# Altium PCB Grabber_DIOT.PCBDOC (part 7 of 7)
Units mm, origin at the board's own origin, x right, y up, seen from the top; angles counter-clockwise.
Board outline 222.9 x 100 mm, 4 copper layers (L1, P2, P3, L4), stack 1.6 mm thick; 235 components, 180 nets, 1032 pads, 664 vias.
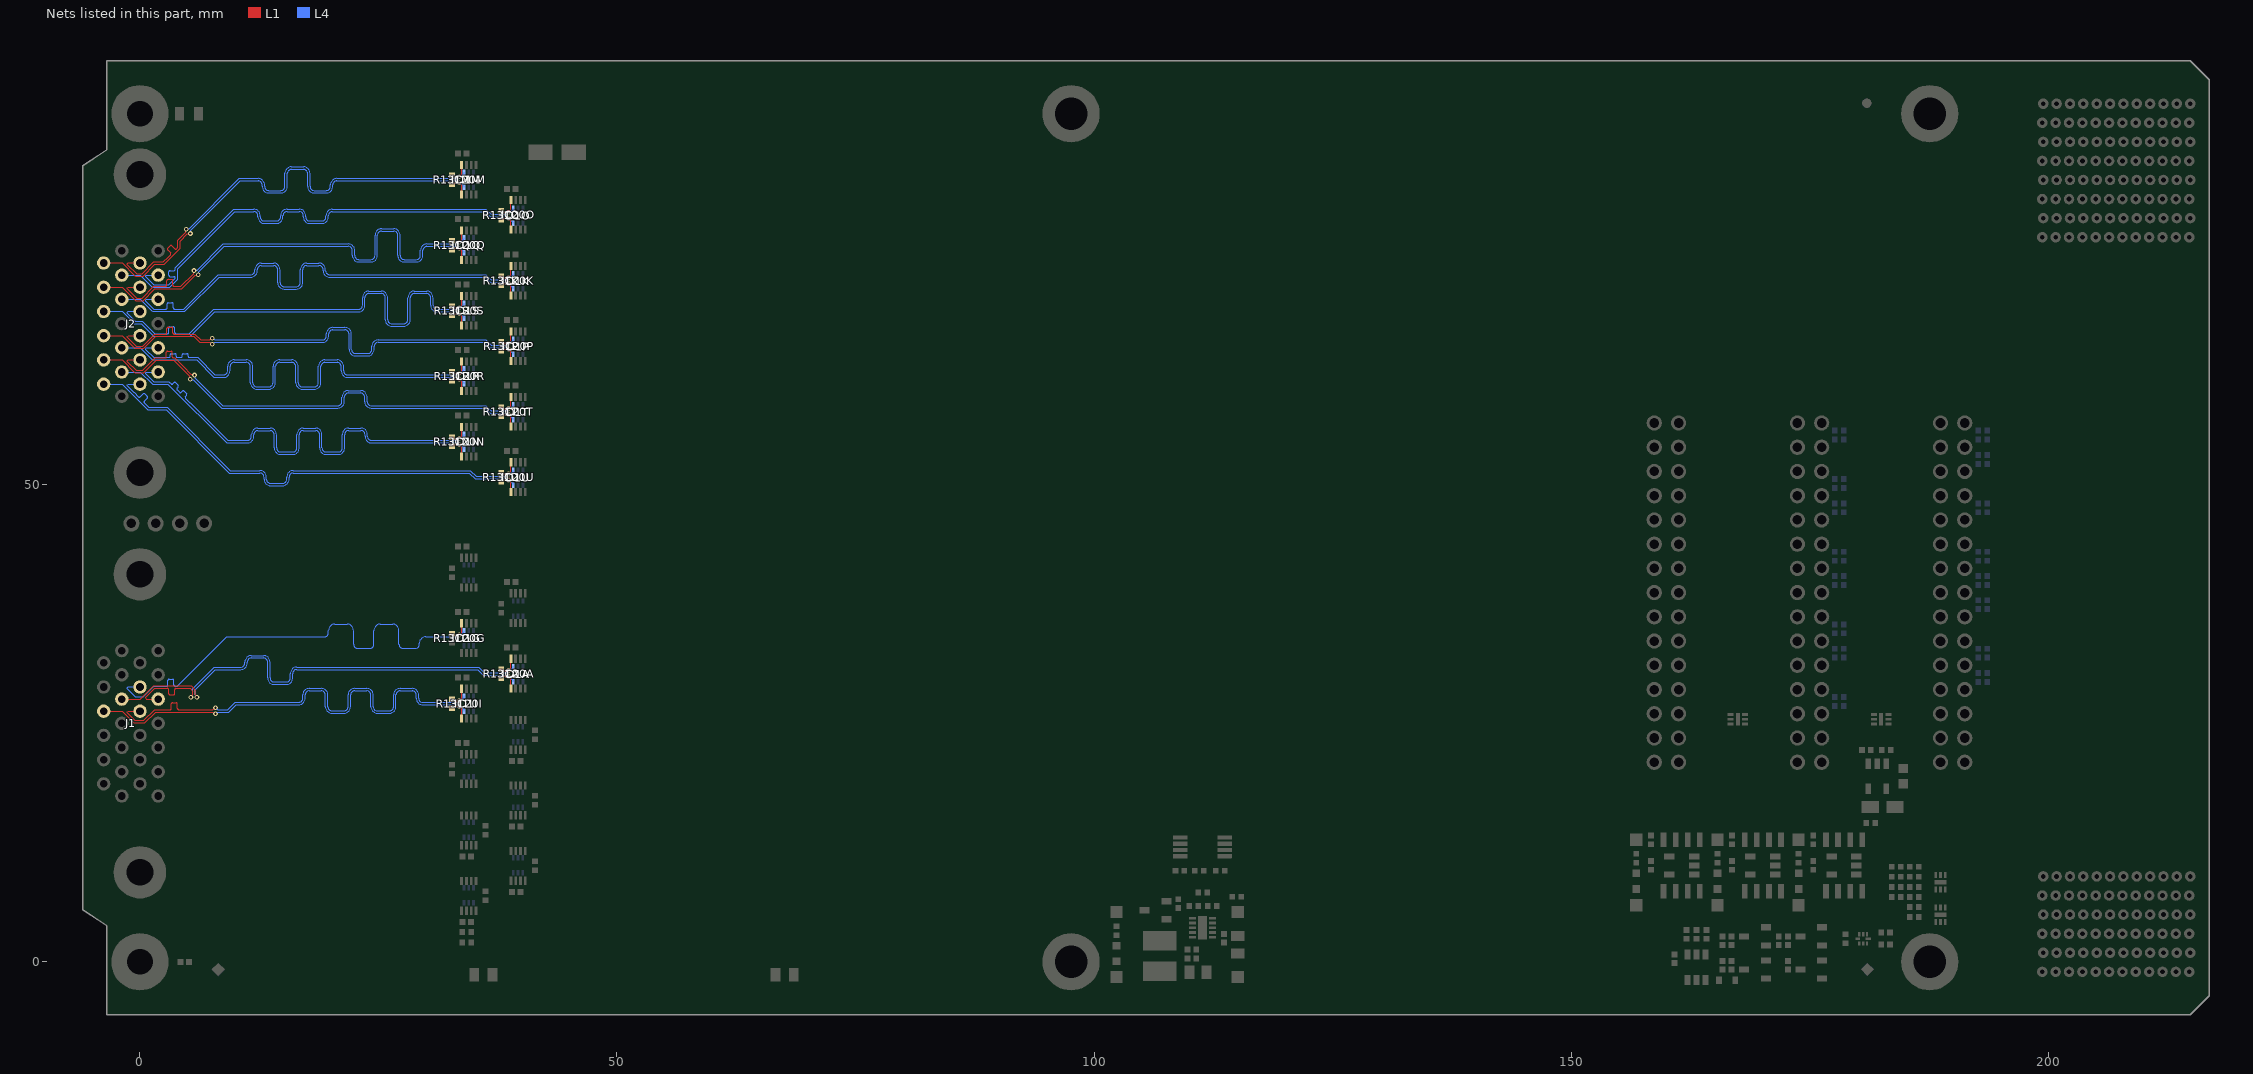
[diagram p8: the nets of this part, all layers, seen from the top]

## Via types
v1: diameter 0.5, hole 0.25, L1 to L4, tented both sides, 661 vias
v2: diameter 0.5, hole 0.25, L1 to L4, 3 vias

## Nets (pads, with @x,y where several pads share a name; then routed paths per layer and width w, separated by ;. In a path a pad name is that pad's centre, name@x,y a point inside that pad or via, vN(x,y) a via of type N, cw(c..) or ccw(c..) an arc to the next point about the centre after c; other vN are vias at no path point) (continued)
X2_P: D1G.4 IC20G.8 J1.10 R131G.2 | length 51.2
  L1 w0.127: R131G.2@32.709,34.403 32.872,34.241 v1@33.465,34.241 ; v1@33.468,34.241 33.718,34.491 IC20G.8@33.718,35.487
  L4 w0.127: J1.10@0,28.81 -1.243,28.81 -1.318,28.736 -1.318,28.63 -0.481,27.794 0.317,27.794 0.954,28.431 1.427,28.904 2.248,28.904 2.803,28.904 ccw(c2.803,29.031) 2.93,29.031 2.93,29.499 cw(c3.056,29.499) 3.056,29.625 3.432,29.625 cw(c3.432,29.499) 3.557,29.499 3.557,29.031 ccw(c3.684,29.031) 3.684,28.904 3.923,28.904 4.311,29.291 9.083,34.064 18.221,34.064 19.327,34.064 ccw(c19.327,34.489) 19.753,34.489 19.753,34.717 cw(c20.432,34.717) 20.432,35.397 21.708,35.397 cw(c21.708,34.717) 22.388,34.717 22.388,33.277 ccw(c22.813,33.277) 22.813,32.852 24.089,32.852 ccw(c24.089,33.277) 24.515,33.277 24.515,34.717 cw(c25.194,34.717) 25.194,35.397 26.47,35.397 cw(c26.47,34.717) 27.15,34.717 27.15,33.277 ccw(c27.575,33.277) 27.575,32.852 28.851,32.852 ccw(c28.851,33.277) 29.277,33.277 29.277,33.384 cw(c29.956,33.384) 29.956,34.064 30.147,34.064 33.204,34.064 33.39,34.25 v1(33.465,34.25) 33.566,34.25 33.822,34.506 33.881,34.506 33.968,34.592 D1G.4@33.968,34.727
X3_N: D1I.3 IC20I.1 J1.21 R131I.1 | length 51.2
  L1 w0.127: J1.21@-3.81,26.27 -1.857,26.27 -0.703,25.117 -0.629,25.042 0.493,25.042 1.634,26.183 7.652,26.183 7.837,25.997 v1(7.913,25.997) ; R131I.1@32.709,26.6 32.88,26.77 33.465,26.77 v1(33.465,26.76) ; v1(33.465,26.76) 33.718,26.507 IC20I.1@33.718,25.524
  L4 w0.127: v1(7.913,25.997) 7.988,25.997 8.174,26.183 9.308,26.183 10.071,26.946 16.44,26.946 16.631,26.946 ccw(c16.631,27.625) 17.31,27.625 17.31,27.976 cw(c17.735,27.976) 17.735,28.401 19.012,28.401 cw(c19.012,27.976) 19.437,27.976 19.437,26.739 ccw(c20.116,26.739) 20.116,26.059 21.393,26.059 ccw(c21.393,26.739) 22.072,26.739 22.072,27.976 cw(c22.497,27.976) 22.497,28.401 23.774,28.401 cw(c23.774,27.976) 24.199,27.976 24.199,26.739 ccw(c24.878,26.739) 24.878,26.059 26.155,26.059 ccw(c26.155,26.739) 26.834,26.739 26.834,27.976 cw(c27.259,27.976) 27.259,28.401 28.536,28.401 cw(c28.536,27.976) 28.961,27.976 28.961,27.625 ccw(c29.64,27.625) 29.64,26.946 30.38,26.946 30.518,26.946 33.204,26.946 33.39,26.76 v1(33.465,26.76) 33.566,26.76 33.821,26.505 33.881,26.505 33.968,26.419 D1I.3@33.968,26.284
X3_P: D1I.4 IC20I.8 J1.8 R131I.2 | length 51.2
  L1 w0.127: J1.8@0,26.27 -1.243,26.27 -1.318,26.196 -1.318,26.09 -0.524,25.296 0.388,25.296 1.528,26.437 2.832,26.437 3.175,26.437 ccw(c3.175,26.564) 3.302,26.564 3.302,27.038 cw(c3.427,27.038) 3.427,27.164 3.803,27.164 cw(c3.803,27.038) 3.929,27.038 3.929,26.564 ccw(c4.056,26.564) 4.056,26.437 4.746,26.437 7.652,26.437 7.837,26.622 v1(7.913,26.622) ; R131I.2@32.709,27.54 32.872,27.377 v1@33.465,27.377 ; v1@33.468,27.377 33.718,27.627 IC20I.8@33.718,28.624
  L4 w0.127: v1(7.913,26.622) 7.988,26.622 8.174,26.437 9.203,26.437 9.966,27.2 14.287,27.2 16.44,27.2 16.631,27.2 ccw(c16.631,27.625) 17.056,27.625 17.056,27.976 cw(c17.735,27.976) 17.735,28.655 19.012,28.655 cw(c19.012,27.976) 19.691,27.976 19.691,26.739 ccw(c20.116,26.739) 20.116,26.313 21.393,26.313 ccw(c21.393,26.739) 21.818,26.739 21.818,27.976 cw(c22.497,27.976) 22.497,28.655 23.774,28.655 cw(c23.774,27.976) 24.453,27.976 24.453,26.739 ccw(c24.878,26.739) 24.878,26.313 26.155,26.313 ccw(c26.155,26.739) 26.58,26.739 26.58,27.976 cw(c27.259,27.976) 27.259,28.655 28.536,28.655 cw(c28.536,27.976) 29.215,27.976 29.215,27.625 ccw(c29.64,27.625) 29.64,27.2 30.38,27.2 30.413,27.2 30.518,27.2 33.204,27.2 33.39,27.386 v1(33.465,27.386) 33.566,27.386 33.822,27.642 33.881,27.642 33.968,27.729 D1I.4@33.968,27.864
XCLK_N: D1A.3 IC20A.1 J1.22 R131A.1 | length 51.3
  L1 w0.127: J1.22@-1.905,27.54 0.048,27.54 1.348,28.84 1.423,28.914 5.352,28.914 5.778,28.488 5.778,27.985 5.964,27.8 v1(5.964,27.725) ; R131A.1@37.872,29.743 38.042,29.914 38.628,29.914 v1(38.628,29.904) 38.88,29.651 IC20A.1@38.88,28.667
  L4 w0.127: v1(5.964,27.725) 5.964,27.8 5.778,27.985 5.778,28.532 7.885,30.639 10.38,30.639 10.57,30.639 ccw(c10.57,31.318) 11.25,31.318 11.25,31.425 cw(c11.675,31.425) 11.675,31.851 12.951,31.851 cw(c12.951,31.425) 13.377,31.425 13.377,29.757 ccw(c14.056,29.757) 14.056,29.077 15.332,29.077 ccw(c15.332,29.757) 16.012,29.757 16.012,30.213 cw(c16.437,30.213) 16.437,30.639 17.586,30.639 35.4,30.639 36,30.04 38.367,30.04 38.553,29.854 38.729,29.854 38.984,29.599 39.044,29.599 39.13,29.512 D1A.3@39.13,29.377
XCLK_P: D1A.4 IC20A.8 J1.9 R131A.2 | length 51.2
  L1 w0.127: J1.9@1.905,27.54 0.662,27.54 0.587,27.614 0.587,27.72 1.002,28.135 1.528,28.66 2.883,28.66 cw(c2.883,28.533) 3.01,28.533 3.01,28.121 ccw(c3.135,28.121) 3.135,27.995 3.511,27.995 ccw(c3.511,28.121) 3.637,28.121 3.637,28.533 cw(c3.764,28.533) 3.764,28.66 4.567,28.66 5.247,28.66 5.524,28.383 5.524,27.985 5.339,27.8 v1(5.339,27.725) ; R131A.2@37.872,30.683 38.034,30.521 v1@38.628,30.521 ; v1@38.63,30.521 38.88,30.771 IC20A.8@38.88,31.767
  L4 w0.127: v1(5.339,27.725) 5.339,27.8 5.524,27.985 5.524,28.638 7.78,30.893 10.38,30.893 10.57,30.893 ccw(c10.57,31.318) 10.996,31.318 10.996,31.425 cw(c11.675,31.425) 11.675,32.105 12.951,32.105 cw(c12.951,31.425) 13.631,31.425 13.631,29.757 ccw(c14.056,29.757) 14.056,29.331 15.332,29.331 ccw(c15.332,29.757) 15.758,29.757 15.758,30.213 cw(c16.437,30.213) 16.437,30.893 17.586,30.893 35.506,30.893 35.58,30.818 36.105,30.294 38.367,30.294 38.553,30.48 38.729,30.48 38.985,30.736 39.044,30.736 39.13,30.822 D1A.4@39.13,30.957
  other v1: 38.628,30.53
Y0_N: D1M.3 IC20M.1 J2.25 R131M.1 | length 51.2
  L1 w0.127: J2.25@-3.81,73.25 -1.857,73.25 -0.536,71.93 -0.462,71.856 0.326,71.856 1.573,73.102 2.556,73.102 4.23,74.776 4.23,75.551 4.97,76.291 5.232,76.291 v1(5.285,76.345) ; R131M.1@32.709,81.51 32.88,81.681 33.465,81.681 v1(33.465,81.671) 33.718,81.418 IC20M.1@33.718,80.434
  L4 w0.127: v1(5.285,76.345) 5.339,76.398 5.339,76.66 10.535,81.856 10.818,81.856 12.385,81.856 cw(c12.385,81.431) 12.81,81.431 12.81,81.273 ccw(c13.489,81.273) 13.489,80.594 14.766,80.594 ccw(c14.766,81.273) 15.445,81.273 15.445,82.643 cw(c15.87,82.643) 15.87,83.068 17.147,83.068 cw(c17.147,82.643) 17.572,82.643 17.572,81.273 ccw(c18.251,81.273) 18.251,80.594 19.528,80.594 ccw(c19.528,81.273) 20.207,81.273 20.207,81.431 cw(c20.632,81.431) 20.632,81.856 20.823,81.856 33.204,81.856 33.39,81.671 v1(33.465,81.671) 33.566,81.671 33.821,81.415 33.881,81.415 33.968,81.329 D1M.3@33.968,81.194
Y0_P: D1M.4 IC20M.8 J2.12 R131M.2 | length 51.2
  L1 w0.127: J2.12@0,73.25 -1.243,73.25 -1.318,73.176 -1.318,73.071 -0.357,72.11 0.221,72.11 1.467,73.356 2.451,73.356 2.96,73.866 3.214,74.119 ccw(c3.124,74.209) 3.214,74.299 2.9,74.613 cw(c2.989,74.701) 2.9,74.79 3.166,75.056 cw(c3.255,74.967) 3.344,75.056 3.657,74.742 ccw(c3.747,74.832) 3.837,74.742 3.976,74.881 3.976,75.489 3.976,75.656 4.79,76.471 4.79,76.733 v1(4.843,76.787) ; R131M.2@32.709,82.45 32.872,82.287 v1@33.465,82.287 ; v1@33.468,82.287 33.718,82.537 IC20M.8@33.718,83.534
  L4 w0.127: v1(4.843,76.787) 4.897,76.84 5.159,76.84 10.43,82.11 10.818,82.11 12.385,82.11 cw(c12.385,81.431) 13.064,81.431 13.064,81.273 ccw(c13.489,81.273) 13.489,80.848 14.766,80.848 ccw(c14.766,81.273) 15.191,81.273 15.191,82.643 cw(c15.87,82.643) 15.87,83.322 17.147,83.322 cw(c17.147,82.643) 17.826,82.643 17.826,81.273 ccw(c18.251,81.273) 18.251,80.848 19.528,80.848 ccw(c19.528,81.273) 19.953,81.273 19.953,81.431 cw(c20.632,81.431) 20.632,82.11 20.823,82.11 33.204,82.11 33.39,82.296 v1(33.465,82.296) 33.566,82.296 33.822,82.552 33.881,82.552 33.968,82.639 D1M.4@33.968,82.774
Y1_N: D1O.3 IC20O.1 J2.24 R131O.1 | length 51.3
  L1 w0.127: R131O.1@37.872,77.79 38.042,77.961 38.628,77.961 v1(38.628,77.951) 38.88,77.697 IC20O.1@38.88,76.714
  L4 w0.127: J2.24@-1.905,71.98 0.048,71.98 1.244,70.785 1.318,70.71 3.128,70.71 3.938,71.521 3.938,72.663 9.91,78.635 10.484,78.635 11.929,78.635 cw(c11.929,78.209) 12.355,78.209 12.355,78.084 ccw(c13.034,78.084) 13.034,77.404 14.31,77.404 ccw(c14.31,78.084) 14.99,78.084 14.99,78.211 cw(c15.415,78.211) 15.415,78.636 16.691,78.636 cw(c16.691,78.211) 17.117,78.211 17.117,78.084 ccw(c17.796,78.084) 17.796,77.404 19.072,77.404 ccw(c19.072,78.084) 19.752,78.084 19.752,78.209 cw(c20.177,78.209) 20.177,78.635 20.368,78.635 36.143,78.635 36.691,78.086 38.367,78.086 38.553,77.901 38.729,77.901 38.984,77.645 39.044,77.645 39.13,77.559 D1O.3@39.13,77.424
Y1_P: D1O.4 IC20O.8 J2.11 R131O.2 | length 51.2
  L1 w0.127: R131O.2@37.872,78.73 38.034,78.567 v1@38.628,78.567 ; v1@38.63,78.567 38.88,78.817 IC20O.8@38.88,79.814
  L4 w0.127: J2.11@1.905,71.98 0.662,71.98 0.587,71.906 0.587,71.801 1.424,70.964 3.023,70.964 3.162,71.104 3.684,71.626 3.684,71.693 ccw(c3.557,71.693) 3.557,71.82 3.157,71.82 cw(c3.157,71.945) 3.032,71.945 3.032,72.321 cw(c3.157,72.321) 3.157,72.447 3.557,72.447 ccw(c3.557,72.574) 3.684,72.574 3.684,72.768 4.307,73.391 9.805,78.889 10.484,78.889 11.929,78.889 cw(c11.929,78.209) 12.609,78.209 12.609,78.084 ccw(c13.034,78.084) 13.034,77.658 14.31,77.658 ccw(c14.31,78.084) 14.736,78.084 14.736,78.211 cw(c15.415,78.211) 15.415,78.89 16.691,78.89 cw(c16.691,78.211) 17.371,78.211 17.371,78.084 ccw(c17.796,78.084) 17.796,77.658 19.072,77.658 ccw(c19.072,78.084) 19.498,78.084 19.498,78.209 cw(c20.177,78.209) 20.177,78.889 20.368,78.889 36.248,78.889 36.796,78.34 38.367,78.34 38.553,78.526 38.729,78.526 38.985,78.782 39.044,78.782 39.13,78.869 D1O.4@39.13,79.004
  other v1: 38.628,78.576
Y2_N: D1Q.3 IC20Q.1 J2.23 R131Q.1 | length 51.2
  L1 w0.127: J2.23@-3.81,70.71 -1.857,70.71 -0.536,69.39 -0.462,69.316 0.326,69.316 1.573,70.562 4.399,70.562 5.794,71.957 6.056,71.957 v1(6.11,72.01) ; R131Q.1@32.709,74.646 32.88,74.817 33.465,74.817 v1(33.465,74.807) ; v1(33.465,74.807) 33.718,74.554 IC20Q.1@33.718,73.57
  L4 w0.127: v1(6.11,72.01) 6.163,72.063 6.163,72.326 8.83,74.993 20.71,74.993 21.83,74.993 cw(c21.83,74.567) 22.256,74.567 22.256,74.037 ccw(c22.935,74.037) 22.935,73.358 24.211,73.358 ccw(c24.211,74.037) 24.891,74.037 24.891,76.167 cw(c25.316,76.167) 25.316,76.592 26.592,76.592 cw(c26.592,76.167) 27.018,76.167 27.018,74.037 ccw(c27.697,74.037) 27.697,73.358 28.973,73.358 ccw(c28.973,74.037) 29.653,74.037 29.653,74.567 cw(c30.078,74.567) 30.078,74.993 30.268,74.993 33.204,74.993 33.39,74.807 v1(33.465,74.807) 33.566,74.807 33.821,74.552 33.881,74.552 33.968,74.465 D1Q.3@33.968,74.33
Y2_P: D1Q.4 IC20Q.8 J2.10 R131Q.2 | length 51.2
  L1 w0.127: J2.10@0,70.71 -1.243,70.71 -1.318,70.636 -1.318,70.531 -0.357,69.57 0.221,69.57 1.467,70.816 2.193,70.816 2.685,70.816 ccw(c2.685,70.943) 2.812,70.943 2.812,71.395 cw(c2.938,71.395) 2.938,71.52 3.314,71.52 cw(c3.314,71.395) 3.439,71.395 3.439,70.943 ccw(c3.566,70.943) 3.566,70.816 4.257,70.816 4.294,70.816 5.614,72.136 5.614,72.399 v1(5.668,72.452) ; R131Q.2@32.709,75.586 32.872,75.424 v1@33.465,75.424 ; v1@33.468,75.424 33.718,75.674 IC20Q.8@33.718,76.67
  L4 w0.127: v1(5.668,72.452) 5.721,72.505 5.983,72.505 8.725,75.247 20.71,75.247 21.83,75.247 cw(c21.83,74.567) 22.51,74.567 22.51,74.037 ccw(c22.935,74.037) 22.935,73.612 24.211,73.612 ccw(c24.211,74.037) 24.637,74.037 24.637,76.167 cw(c25.316,76.167) 25.316,76.846 26.592,76.846 cw(c26.592,76.167) 27.272,76.167 27.272,74.037 ccw(c27.697,74.037) 27.697,73.612 28.973,73.612 ccw(c28.973,74.037) 29.399,74.037 29.399,74.567 cw(c30.078,74.567) 30.078,75.247 30.268,75.247 33.204,75.247 33.39,75.433 v1(33.465,75.433) 33.566,75.433 33.822,75.689 33.881,75.689 33.968,75.775 D1Q.4@33.968,75.91
Y3_N: D1S.3 IC20S.1 J2.21 R131S.1 | length 51.2
  L1 w0.127: R131S.1@32.709,67.782 32.88,67.953 33.465,67.953 v1(33.465,67.943) 33.718,67.69 IC20S.1@33.718,66.706
  L4 w0.127: J2.21@-3.81,68.17 -1.857,68.17 -0.661,66.975 -0.587,66.9 0.129,66.9 1.442,65.587 5.288,65.587 7.83,68.129 22.708,68.129 22.899,68.129 ccw(c22.899,68.808) 23.578,68.808 23.578,69.631 cw(c24.003,69.631) 24.003,70.057 25.28,70.057 cw(c25.28,69.631) 25.705,69.631 25.705,67.314 ccw(c26.384,67.314) 26.384,66.634 27.661,66.634 ccw(c27.661,67.314) 28.34,67.314 28.34,69.631 cw(c28.765,69.631) 28.765,70.057 30.042,70.057 cw(c30.042,69.631) 30.467,69.631 30.467,68.808 ccw(c31.146,68.808) 31.146,68.129 32.165,68.129 33.204,68.129 33.39,67.943 v1(33.465,67.943) 33.566,67.943 33.821,67.688 33.881,67.688 33.968,67.601 D1S.3@33.968,67.466
Y3_P: D1S.4 IC20S.8 J2.8 R131S.2 | length 51.2
  L1 w0.127: R131S.2@32.709,68.722 32.872,68.56 v1@33.465,68.56 ; v1@33.468,68.56 33.718,68.81 IC20S.8@33.718,69.806
  L4 w0.127: J2.8@0,68.17 -1.243,68.17 -1.318,68.096 -1.318,67.991 -0.481,67.154 0.234,67.154 1.547,65.841 2.398,65.841 2.881,65.841 ccw(c2.881,65.968) 3.008,65.968 3.008,66.427 cw(c3.133,66.427) 3.133,66.552 3.509,66.552 cw(c3.509,66.427) 3.635,66.427 3.635,65.968 ccw(c3.762,65.968) 3.762,65.841 4.452,65.841 5.183,65.841 7.725,68.383 22.708,68.383 22.899,68.383 ccw(c22.899,68.808) 23.324,68.808 23.324,69.631 cw(c24.003,69.631) 24.003,70.311 25.28,70.311 cw(c25.28,69.631) 25.959,69.631 25.959,67.314 ccw(c26.384,67.314) 26.384,66.888 27.661,66.888 ccw(c27.661,67.314) 28.086,67.314 28.086,69.631 cw(c28.765,69.631) 28.765,70.311 30.042,70.311 cw(c30.042,69.631) 30.721,69.631 30.721,68.808 ccw(c31.146,68.808) 31.146,68.383 32.165,68.383 33.204,68.383 33.39,68.569 v1(33.465,68.569) 33.566,68.569 33.822,68.825 33.881,68.825 33.968,68.911 D1S.4@33.968,69.046
YCLK_N: D1K.3 IC20K.1 J2.22 R131K.1 | length 51.3
  L1 w0.127: R131K.1@37.872,70.926 38.042,71.097 38.628,71.097 v1(38.628,71.087) ; v1(38.628,71.087) 38.88,70.834 IC20K.1@38.88,69.85
  L4 w0.127: J2.22@-1.905,69.44 0.048,69.44 1.244,68.245 1.318,68.17 4.693,68.17 8.294,71.771 11.43,71.771 11.621,71.771 ccw(c11.621,72.45) 12.3,72.45 12.3,72.558 cw(c12.726,72.558) 12.726,72.983 14.002,72.983 cw(c14.002,72.558) 14.427,72.558 14.427,71.199 ccw(c15.107,71.199) 15.107,70.52 16.383,70.52 ccw(c16.383,71.199) 17.062,71.199 17.062,72.558 cw(c17.488,72.558) 17.488,72.983 18.764,72.983 cw(c18.764,72.558) 19.189,72.558 19.189,72.45 ccw(c19.869,72.45) 19.869,71.771 21.013,71.771 36.143,71.771 36.691,71.223 38.367,71.223 38.553,71.037 38.729,71.037 38.984,70.782 39.044,70.782 39.13,70.695 D1K.3@39.13,70.56
YCLK_P: D1K.4 IC20K.8 J2.9 R131K.2 | length 51.2
  L1 w0.127: R131K.2@37.872,71.866 38.034,71.703 v1@38.628,71.703 ; v1@38.63,71.703 38.88,71.953 IC20K.8@38.88,72.95
  L4 w0.127: J2.9@1.905,69.44 0.662,69.44 0.587,69.366 0.587,69.261 1.424,68.424 2.283,68.424 2.727,68.424 ccw(c2.727,68.551) 2.854,68.551 2.854,68.98 cw(c2.98,68.98) 2.98,69.106 3.356,69.106 cw(c3.356,68.98) 3.481,68.98 3.481,68.551 ccw(c3.608,68.551) 3.608,68.424 4.299,68.424 4.588,68.424 8.189,72.025 11.43,72.025 11.621,72.025 ccw(c11.621,72.45) 12.046,72.45 12.046,72.558 cw(c12.726,72.558) 12.726,73.237 14.002,73.237 cw(c14.002,72.558) 14.681,72.558 14.681,71.199 ccw(c15.107,71.199) 15.107,70.774 16.383,70.774 ccw(c16.383,71.199) 16.808,71.199 16.808,72.558 cw(c17.488,72.558) 17.488,73.237 18.764,73.237 cw(c18.764,72.558) 19.443,72.558 19.443,72.45 ccw(c19.869,72.45) 19.869,72.025 21.013,72.025 36.248,72.025 36.796,71.477 38.367,71.477 38.553,71.662 38.729,71.662 38.985,71.919 39.044,71.919 39.13,72.005 D1K.4@39.13,72.14
  other v1: 38.628,71.712
Z0_N: D1P.3 IC20P.1 J2.19 R131P.1 | length 51.2
  L1 w0.127: J2.19@-3.81,65.63 -1.857,65.63 -0.589,64.362 -0.514,64.288 0.378,64.288 1.641,65.55 5.628,65.55 6.25,64.929 7.308,64.929 7.494,64.743 v1(7.569,64.743) ; R131P.1@37.872,64.062 38.042,64.233 38.628,64.233 v1(38.628,64.223) 38.88,63.97 IC20P.1@38.88,62.986
  L4 w0.127: v1(7.569,64.743) 7.644,64.743 7.83,64.928 18.917,64.928 19.107,64.928 ccw(c19.107,65.608) 19.786,65.608 19.786,65.816 cw(c20.212,65.816) 20.212,66.242 21.488,66.242 cw(c21.488,65.816) 21.913,65.816 21.913,64.193 ccw(c22.593,64.193) 22.593,63.513 23.869,63.513 ccw(c23.869,64.193) 24.548,64.193 24.548,64.503 cw(c24.974,64.503) 24.974,64.928 26.388,64.928 36.121,64.928 36.502,64.548 36.691,64.359 38.367,64.359 38.553,64.173 38.729,64.173 38.984,63.918 39.044,63.918 39.13,63.831 D1P.3@39.13,63.696
Z0_P: D1P.4 IC20P.8 J2.6 R131P.2 | length 51.2
  L1 w0.127: J2.6@0,65.63 -1.243,65.63 -1.318,65.556 -1.318,65.451 -0.409,64.542 0.273,64.542 1.535,65.804 2.428,65.804 2.701,65.804 ccw(c2.701,65.931) 2.828,65.931 2.828,66.385 cw(c2.954,66.385) 2.954,66.51 3.33,66.51 cw(c3.33,66.385) 3.455,66.385 3.455,65.931 ccw(c3.582,65.931) 3.582,65.804 4.273,65.804 5.734,65.804 6.355,65.183 7.308,65.183 7.494,65.368 v1(7.569,65.368) ; R131P.2@37.872,65.002 38.034,64.84 v1@38.628,64.84 ; v1@38.63,64.84 38.88,65.09 IC20P.8@38.88,66.086
  L4 w0.127: v1(7.569,65.368) 7.644,65.368 7.83,65.182 18.917,65.182 19.107,65.182 ccw(c19.107,65.608) 19.532,65.608 19.532,65.816 cw(c20.212,65.816) 20.212,66.496 21.488,66.496 cw(c21.488,65.816) 22.167,65.816 22.167,64.193 ccw(c22.593,64.193) 22.593,63.767 23.869,63.767 ccw(c23.869,64.193) 24.294,64.193 24.294,64.503 cw(c24.974,64.503) 24.974,65.182 26.388,65.182 36.227,65.182 36.796,64.613 38.367,64.613 38.553,64.799 38.729,64.799 38.985,65.055 39.044,65.055 39.13,65.141 D1P.4@39.13,65.276
  other v1: 38.628,64.849
Z1_N: D1R.3 IC20R.1 J2.18 R131R.1 | length 51.2
  L1 w0.127: R131R.1@32.709,60.919 32.88,61.089 33.465,61.089 v1(33.465,61.079) ; v1(33.465,61.079) 33.718,60.826 IC20R.1@33.718,59.843
  L4 w0.127: J2.18@-1.905,64.36 0.048,64.36 1.244,63.165 1.318,63.09 5.93,63.09 7.755,61.265 8.57,61.265 8.76,61.265 ccw(c8.76,61.944) 9.44,61.944 9.44,62.412 cw(c9.865,62.412) 9.865,62.837 11.141,62.837 cw(c11.141,62.412) 11.567,62.412 11.567,60.708 ccw(c12.246,60.708) 12.246,60.029 13.522,60.029 ccw(c13.522,60.708) 14.202,60.708 14.202,62.412 cw(c14.627,62.412) 14.627,62.837 15.903,62.837 cw(c15.903,62.412) 16.329,62.412 16.329,60.708 ccw(c17.008,60.708) 17.008,60.029 18.284,60.029 ccw(c18.284,60.708) 18.964,60.708 18.964,62.412 cw(c19.389,62.412) 19.389,62.837 20.665,62.837 cw(c20.665,62.412) 21.091,62.412 21.091,61.944 ccw(c21.77,61.944) 21.77,61.265 22.966,61.265 33.204,61.265 33.39,61.079 v1(33.465,61.079) 33.566,61.079 33.821,60.824 33.881,60.824 33.968,60.738 D1R.3@33.968,60.603
Z1_P: D1R.4 IC20R.8 J2.5 R131R.2 | length 51.2
  L1 w0.127: R131R.2@32.709,61.859 32.872,61.696 v1@33.465,61.696 ; v1@33.468,61.696 33.718,61.946 IC20R.8@33.718,62.943
  L4 w0.127: J2.5@1.905,64.36 0.662,64.36 0.587,64.286 0.587,64.181 1.424,63.344 2.635,63.344 3.04,63.344 ccw(c3.04,63.471) 3.167,63.471 3.167,63.625 cw(c3.292,63.625) 3.292,63.751 3.669,63.751 cw(c3.669,63.625) 3.794,63.625 3.794,63.47 ccw(c3.919,63.47) 3.919,63.344 4.296,63.344 ccw(c4.296,63.47) 4.421,63.47 4.421,63.625 cw(c4.546,63.625) 4.546,63.751 4.923,63.751 cw(c4.923,63.625) 5.048,63.625 5.048,63.471 ccw(c5.175,63.471) 5.175,63.344 5.865,63.344 6.035,63.344 7.86,61.519 8.57,61.519 8.76,61.519 ccw(c8.76,61.944) 9.186,61.944 9.186,62.412 cw(c9.865,62.412) 9.865,63.091 11.141,63.091 cw(c11.141,62.412) 11.821,62.412 11.821,60.708 ccw(c12.246,60.708) 12.246,60.283 13.522,60.283 ccw(c13.522,60.708) 13.948,60.708 13.948,62.412 cw(c14.627,62.412) 14.627,63.091 15.903,63.091 cw(c15.903,62.412) 16.583,62.412 16.583,60.708 ccw(c17.008,60.708) 17.008,60.283 18.284,60.283 ccw(c18.284,60.708) 18.71,60.708 18.71,62.412 cw(c19.389,62.412) 19.389,63.091 20.665,63.091 cw(c20.665,62.412) 21.345,62.412 21.345,61.944 ccw(c21.77,61.944) 21.77,61.519 22.966,61.519 33.204,61.519 33.39,61.705 v1(33.465,61.705) 33.566,61.705 33.822,61.961 33.881,61.961 33.968,62.048 D1R.4@33.968,62.183
Z2_N: D1T.3 IC20T.1 J2.17 R131T.1 | length 51.2
  L1 w0.127: J2.17@-3.81,63.09 -1.857,63.09 -0.583,61.816 -0.508,61.742 0.372,61.742 1.683,63.052 3.545,63.052 4.659,61.938 4.984,61.613 5.223,61.374 5.223,61.112 v1(5.277,61.058) ; R131T.1@37.872,57.198 38.042,57.369 38.628,57.369 v1(38.628,57.359) 38.88,57.106 IC20T.1@38.88,56.122
  L4 w0.127: v1(5.277,61.058) 5.33,61.005 5.592,61.005 8.554,58.043 20.553,58.043 20.744,58.043 ccw(c20.744,58.723) 21.423,58.723 21.423,59.199 cw(c21.849,59.199) 21.849,59.624 23.125,59.624 cw(c23.125,59.199) 23.55,59.199 23.55,58.723 ccw(c24.23,58.723) 24.23,58.043 25.564,58.043 36.143,58.043 36.691,57.495 38.367,57.495 38.553,57.309 38.729,57.309 38.984,57.054 39.044,57.054 39.13,56.967 D1T.3@39.13,56.832
Z2_P: D1T.4 IC20T.8 J2.4 R131T.2 | length 51.2
  L1 w0.127: J2.4@0,63.09 -1.243,63.09 -1.318,63.016 -1.318,62.911 -0.403,61.996 0.267,61.996 1.578,63.306 2.202,63.306 2.639,63.306 ccw(c2.639,63.433) 2.766,63.433 2.766,63.874 cw(c2.891,63.874) 2.891,63.999 3.267,63.999 cw(c3.267,63.874) 3.393,63.874 3.393,63.433 ccw(c3.52,63.433) 3.52,63.306 3.65,63.306 4.337,62.619 4.659,62.298 5.238,61.719 5.403,61.554 5.665,61.554 v1(5.719,61.5) ; R131T.2@37.872,58.138 38.034,57.976 v1@38.628,57.976 ; v1@38.63,57.976 38.88,58.226 IC20T.8@38.88,59.222
  L4 w0.127: v1(5.719,61.5) 5.772,61.447 5.772,61.185 8.659,58.297 20.553,58.297 20.744,58.297 ccw(c20.744,58.723) 21.169,58.723 21.169,59.199 cw(c21.849,59.199) 21.849,59.878 23.125,59.878 cw(c23.125,59.199) 23.804,59.199 23.804,58.723 ccw(c24.23,58.723) 24.23,58.297 25.564,58.297 36.248,58.297 36.796,57.749 38.367,57.749 38.553,57.935 38.729,57.935 38.985,58.191 39.044,58.191 39.13,58.277 D1T.4@39.13,58.412
  other v1: 38.628,57.985
Z3_N: D1U.3 IC20U.1 J2.15 R131U.1 | length 51.3
  L1 w0.127: R131U.1@37.872,50.335 38.042,50.505 38.628,50.505 v1(38.628,50.495) ; v1(38.628,50.495) 38.88,50.242 IC20U.1@38.88,49.259
  L4 w0.127: J2.15@-3.81,60.55 -1.857,60.55 0.822,57.872 2.743,57.872 9.382,51.232 11.11,51.232 12.576,51.232 cw(c12.576,50.807) 13.002,50.807 13.002,50.59 ccw(c13.681,50.59) 13.681,49.911 14.957,49.911 ccw(c14.957,50.59) 15.637,50.59 15.637,50.807 cw(c16.062,50.807) 16.062,51.232 16.253,51.232 34.53,51.232 35.131,50.631 38.367,50.631 38.553,50.445 38.729,50.445 38.984,50.19 39.044,50.19 39.13,50.104 D1U.3@39.13,49.969
Z3_P: D1U.4 IC20U.8 J2.2 R131U.2 | length 51.2
  L1 w0.127: R131U.2@37.872,51.275 38.034,51.112 v1@38.628,51.112 ; v1@38.63,51.112 38.88,51.362 IC20U.8@38.88,52.359
  L4 w0.127: J2.2@0,60.55 -1.243,60.55 -1.318,60.476 -1.318,60.371 -0.668,59.721 -0.623,59.676 -0.166,59.219 ccw(c-0.076,59.309) 0.013,59.219 0.323,59.528 cw(c0.411,59.44) 0.5,59.528 0.766,59.262 cw(c0.677,59.174) 0.766,59.085 0.457,58.776 ccw(c0.546,58.686) 0.457,58.596 0.9,58.153 0.927,58.126 0.963,58.126 2.848,58.126 9.488,51.486 11.11,51.486 12.576,51.486 cw(c12.576,50.807) 13.256,50.807 13.256,50.59 ccw(c13.681,50.59) 13.681,50.165 14.957,50.165 ccw(c14.957,50.59) 15.383,50.59 15.383,50.807 cw(c16.062,50.807) 16.062,51.486 16.253,51.486 34.635,51.486 35.236,50.885 38.367,50.885 38.553,51.071 38.729,51.071 38.985,51.327 39.044,51.327 39.13,51.414 D1U.4@39.13,51.549
  other v1: 38.628,51.121
ZCLK_N: D1N.3 IC20N.1 J2.16 R131N.1 | length 51.2
  L1 w0.127: R131N.1@32.709,54.055 32.88,54.225 33.465,54.225 v1(33.465,54.215) 33.718,53.962 IC20N.1@33.718,52.979
  L4 w0.127: J2.16@-1.905,61.82 0.048,61.82 1.244,60.625 1.318,60.55 2.927,60.55 9.076,54.401 11.066,54.401 11.256,54.401 ccw(c11.256,55.081) 11.935,55.081 11.935,55.265 cw(c12.361,55.265) 12.361,55.691 13.637,55.691 cw(c13.637,55.265) 14.062,55.265 14.062,53.869 ccw(c14.742,53.869) 14.742,53.189 16.018,53.189 ccw(c16.018,53.869) 16.697,53.869 16.697,55.265 cw(c17.123,55.265) 17.123,55.691 18.399,55.691 cw(c18.399,55.265) 18.824,55.265 18.824,53.869 ccw(c19.504,53.869) 19.504,53.189 20.78,53.189 ccw(c20.78,53.869) 21.459,53.869 21.459,55.265 cw(c21.885,55.265) 21.885,55.691 23.161,55.691 cw(c23.161,55.265) 23.586,55.265 23.586,55.081 ccw(c24.266,55.081) 24.266,54.401 26.755,54.401 33.204,54.401 33.39,54.215 v1(33.465,54.215) 33.566,54.215 33.821,53.96 33.881,53.96 33.968,53.874 D1N.3@33.968,53.739
ZCLK_P: D1N.4 IC20N.8 J2.3 R131N.2 | length 51.2
  L1 w0.127: R131N.2@32.709,54.995 32.872,54.832 v1@33.465,54.832 ; v1@33.468,54.832 33.718,55.082 IC20N.8@33.718,56.079
  L4 w0.127: J2.3@1.905,61.82 0.662,61.82 0.587,61.746 0.587,61.641 1.424,60.804 3.032,60.804 3.114,60.722 3.159,60.677 3.26,60.577 ccw(c3.35,60.666) 3.439,60.577 3.556,60.693 cw(c3.645,60.605) 3.734,60.693 4,60.427 cw(c3.911,60.339) 4,60.25 3.882,60.132 ccw(c3.97,60.043) 3.882,59.955 4.148,59.689 ccw(c4.236,59.777) 4.325,59.689 4.443,59.807 cw(c4.532,59.718) 4.62,59.807 4.886,59.541 cw(c4.798,59.452) 4.886,59.363 4.77,59.246 ccw(c4.859,59.157) 4.77,59.067 5.213,58.623 5.258,58.579 9.181,54.655 11.066,54.655 11.256,54.655 ccw(c11.256,55.081) 11.681,55.081 11.681,55.265 cw(c12.361,55.265) 12.361,55.945 13.637,55.945 cw(c13.637,55.265) 14.316,55.265 14.316,53.869 ccw(c14.742,53.869) 14.742,53.443 16.018,53.443 ccw(c16.018,53.869) 16.443,53.869 16.443,55.265 cw(c17.123,55.265) 17.123,55.945 18.399,55.945 cw(c18.399,55.265) 19.078,55.265 19.078,53.869 ccw(c19.504,53.869) 19.504,53.443 20.78,53.443 ccw(c20.78,53.869) 21.205,53.869 21.205,55.265 cw(c21.885,55.265) 21.885,55.945 23.161,55.945 cw(c23.161,55.265) 23.84,55.265 23.84,55.081 ccw(c24.266,55.081) 24.266,54.655 26.755,54.655 33.204,54.655 33.39,54.841 v1(33.465,54.841) 33.566,54.841 33.822,55.097 33.881,55.097 33.968,55.184 D1N.4@33.968,55.319
pads on no net: FTG1.FTG2 FTG2.1 FTG3.1 FTG4.FTG2 FTG5.1 FTG6.1 IC27.4 J2.7 J2.20 T_D1.5 T_D2.5 T_D3.5 T_D4.1 T_D4.3 T_D4.5 T_IC1.4 T_IC2.5 T_IC3.7 T_IC4.5 T_IC5.7 T_IC9.5 T_IC10.7 T_J3.17 T_J3.18 T_J3.20 T_J3.21 T_J3.23 T_J3.24 T_J4.B1 T_J4.L2 T_J5.A3 T_J5.A5 T_J5.A7 T_J5.A8 T_J5.B2 T_J5.B3 T_J5.B4 T_J5.B5 T_J5.B6 T_J5.B7 T_J5.B8 T_J5.C2 T_J5.C4 T_J5.C6 T_J5.C8 T_J5.D3 T_J5.D5 T_J5.D7 T_J5.D8 T_J5.E2 T_J5.E3 T_J5.E4 T_J5.E5 T_J5.E6 T_J5.E7 T_J5.E8 T_J5.F2 T_J5.F4 T_J5.F6 T_J5.F8 T_J5.G3 T_J5.G5 T_J5.G7 T_J5.H2 T_J5.H3 T_J5.H4 T_J5.H5 T_J5.H6 T_J5.H7 T_J5.H8 T_J5.I2 T_J5.I4 T_J5.I6 T_J5.I8 T_J5.J3 T_J5.J5 T_J5.J7 T_J5.K2 T_J5.K3 T_J5.K4 T_J5.K5 T_J5.K6 T_J5.K7 T_J5.K8 T_J5.L2 T_J5.L4 T_J5.L6 T_J5.L8

## Polygon pours and split planes (outlines as drawn)
no net on L1 "Balancing_L1" (solid, pour order 56): -6,5.45 -3.5,3.8 -3.5,-5.55 214.9,-5.55 216.9,-3.55 216.9,92.45 214.9,94.45 -3.5,94.45 -3.5,85.1 -6,83.45
P3V3 on L1 "P3V3_L01_P053" (solid, remove dead copper, pour order 53): 33.908,22.345 34.405,21.847 34.405,1.205 34.918,0.692 91.672,0.692 94.423,3.443 102.758,3.443 103.01,3.192 103.01,-1.592 103.406,-1.988 110.333,-1.988 110.533,-1.788 110.533,-0.204 110.127,0.202 110.127,2.026 110.353,2.252 110.564,2.252 110.669,2.357 110.669,2.719 109.152,2.719 108.871,2.438 108.871,0.491 108.691,0.311 105.006,0.311 104.814,0.503 104.814,3.437 105.044,3.667 106.483,3.667 106.793,3.977 106.793,6.743 106.997,6.948 108.443,6.948 108.52,6.871 108.52,6.291 109.14,6.291 109.14,7.336 108.823,7.652 55.547,7.652 50.915,12.284 50.915,79.246 47.133,83.028 44.142,83.028 43.725,83.444 43.725,87.207 43.151,87.781 35.315,87.781 33.908,86.374
P12V0 on L1 "P12V0_L01_P048" (solid, remove dead copper, pour order 48): 174.701,18.753 173.563,17.615 169.64,17.615 166.285,20.969 161.014,20.969 160.329,20.284 160.329,18.956 155.651,14.278 155.651,-1.242 155.663,-1.254 116.84,-1.254 116.84,1.462 116.146,2.156 114.362,2.156 113.918,2.603 113.298,2.603 113.298,4.998 114.163,5.862 117.525,5.862 147.599,5.862 149.322,7.585 149.322,16.754 155.991,23.424 158.935,23.424 159.934,24.422 161.79,24.422 162.845,23.368 172.149,23.368 173.142,22.374 174.701,22.374
STRIP2 on L1 "esd1" (solid, pour order 40): 96.932,-5.55 96.932,-3.156 41.932,-3.156 41.932,-5.55
STRIP3 on L1 "STRIP3_L01_P039" (solid, pour order 39): 214.9,-5.55 217.294,-3.156 116.932,-3.156 116.932,-5.55
STRIP1 on L1 "esd1" (solid, pour order 38): 3,1.7 ccw(c1,1.7) 1,3.7 -3.2,3.7 -3.2,-5.55 36.5,-5.55 36.5,-3.156 3,-3.156
GND on L1 "GND_L01_P051" (solid, remove dead copper, pour order 51): 110.899,4.819 110.899,2.243 110.787,2.131 110.524,2.131 110.407,2.014 110.407,-0.092 110.454,-0.138 111.109,-0.138 111.283,-0.312 111.283,-1.967 111.54,-2.224 116.179,-2.224 116.469,-1.934 116.469,1.303 116.07,1.702 114.245,1.702 114.106,1.841 114.106,2.223 114.006,2.323 113.242,2.323 113.085,2.48 113.085,2.613 112.978,2.719 111.964,2.719 111.839,2.845 111.839,4.819
P3V3_MP on L1 "P3V3_MP_L01_P047" (solid, remove dead copper, pour order 47): 181.609,14.866 181.609,14.246 182.368,14.246 182.568,14.046 182.568,9.812 182.721,9.659 183.89,9.659 183.89,10.874 186.512,13.495 187.939,13.495 190.242,15.798 190.242,18.76 191.836,20.354 191.27,20.92 191.27,21.72 190.126,21.72 188.944,20.538 188.944,16.666 187.145,14.866 182.189,14.866
P3V3_MP on L1 "P3V3_MP_L01_P045" (solid, remove dead copper, pour order 45): 174.493,13.783 174.801,14.091 177.975,14.091 178.179,14.295 178.179,15.63 177.927,15.882 174.732,15.882 173.223,14.374 173.223,12.162 174.493,12.162
no net on L4 "Balancing_L4" (solid, pour order 57): -6,5.45 -3.5,3.8 -3.5,-5.55 214.9,-5.55 216.9,-3.55 216.9,92.45 214.9,94.45 -3.5,94.45 -3.5,85.1 -6,83.45
P3V3_MP on L4 "P3V3_MP_L04_P049" (solid, remove dead copper, pour order 49): 183.028,12.361 182.35,12.361 181.574,11.586 181.574,3.805 179.683,1.914 120.786,1.914 114.668,8.031 112.528,8.031 112.141,7.644 112.141,7.28 112.527,6.894 114.437,6.894 120.362,0.97 180.225,0.97 182.778,3.523 182.778,4.754 183.218,5.194 183.218,12.172
P12V0 on L4 "P12V0_L04_P058" (solid, remove dead copper, pour order 58): 156.067,20.669 156.067,21.253 157.564,22.75 158.82,22.75 159.782,23.712 162.723,23.712 163.309,23.126 163.309,21.827 161.593,20.112 156.624,20.112
P12V0 on L4 "P12V0_L04_P046" (solid, remove dead copper, pour order 46): 216.9,0.321 216.9,-2.759 192.618,-2.759 192.6,-2.777 192.6,7.233 182.434,17.399 171.927,17.399 170.998,18.328 170.998,20.714 172.004,21.72 172.608,21.72 173.08,22.192 173.08,22.81 175.297,25.027 192.147,25.027 193.318,23.856 193.318,11.177 194.588,9.908 194.588,1.854 197.492,-1.05 199.4,-1.05 199.95,-0.5 208.7,-0.5 209.521,0.321
GND on L4 "GND_L04_P043" (solid, remove dead copper, pour order 43): 202.9,46.2 202.9,42.7 216.9,42.7 216.9,46.2
STRIP2 on L4 "esd1" (solid, pour order 42): 96.932,-5.55 96.932,-3.156 41.932,-3.156 41.932,-5.55
STRIP3 on L4 "STRIP3_L04_P041" (solid, pour order 41): 214.9,-5.55 217.294,-3.156 116.932,-3.156 116.932,-5.55
STRIP1 on L4 "esd1" (solid, pour order 37): 3,1.7 ccw(c1,1.7) 1,3.7 -3.5,3.7 -3.5,-5.55 36.5,-5.55 36.5,-3.156 3,-3.156
P3V3_MP on L4 "P3V3_MP_L04_P050" (solid, remove dead copper, pour order 50): 176.44,14.909 176.44,14.686 177.031,14.095 179.291,14.095 181.907,11.479 181.907,9.331 182.362,9.331 184.334,11.302 184.334,12.209 180.668,15.875 176.892,15.875 176.44,15.423
GND on P2 (split plane): 216.39,92.239 216.39,-3.339 214.689,-5.04 -2.99,-5.04 -2.99,3.8 -2.99,3.801 -2.99,3.803 -2.995,3.851 -2.999,3.9 -3,3.901 -3,3.902 -3.014,3.949 -3.028,3.995 -3.029,3.997 -3.03,3.998 -3.053,4.041 -3.076,4.084 -3.076,4.085 -3.077,4.086 -3.108,4.123 -3.139,4.161 -3.14,4.162 -3.141,4.163 -3.179,4.193 -3.216,4.224 -3.218,4.225 -3.219,4.226 -5.49,5.725 -5.49,83.175 -3.219,84.674 -3.218,84.675 -3.216,84.676 -3.179,84.707 -3.141,84.737 -3.14,84.738 -3.139,84.739 -3.108,84.777 -3.077,84.814 -3.076,84.815 -3.076,84.816 -3.053,84.859 -3.03,84.902 -3.029,84.903 -3.028,84.905 -3.014,84.951 -3,84.998 -3,84.999 -2.999,85 -2.995,85.049 -2.99,85.097 -2.99,85.099 -2.99,85.1 -2.99,93.94 214.689,93.94
GND on P3 (split plane): 216.39,92.239 216.39,0.348 209.532,0.348 208.971,0.91 208.929,0.937 208.88,0.947 208.354,0.947 208.305,0.937 208.264,0.91 207.702,0.348 192.598,0.348 138.598,0.348 121.546,0.348 121.247,0.647 119.683,2.211 119.641,2.239 119.592,2.249 117.817,2.249 117.768,2.239 117.727,2.211 116.836,1.321 116.808,1.279 116.799,1.231 116.799,-3.077 41.014,-3.077 38.236,-0.299 38.194,-0.271 38.145,-0.261 37.561,-0.261 37.512,-0.271 37.471,-0.299 36.611,-1.159 36.583,-1.2 36.574,-1.249 36.574,-5.04 -2.99,-5.04 -2.99,3.8 -2.99,3.801 -2.99,3.803 -2.995,3.851 -2.999,3.9 -3,3.901 -3,3.902 -3.014,3.949 -3.028,3.995 -3.029,3.997 -3.03,3.998 -3.053,4.041 -3.076,4.084 -3.076,4.085 -3.077,4.086 -3.108,4.123 -3.139,4.161 -3.14,4.162 -3.141,4.163 -3.179,4.193 -3.216,4.224 -3.218,4.225 -3.219,4.226 -5.49,5.725 -5.49,83.175 -3.219,84.674 -3.218,84.675 -3.216,84.676 -3.179,84.707 -3.141,84.737 -3.14,84.738 -3.139,84.739 -3.108,84.777 -3.077,84.814 -3.076,84.815 -3.076,84.816 -3.053,84.859 -3.03,84.902 -3.029,84.903 -3.028,84.905 -3.014,84.951 -3,84.998 -3,84.999 -2.999,85 -2.995,85.049 -2.99,85.097 -2.99,85.099 -2.99,85.1 -2.99,93.94 214.689,93.94
STRIP3 on P3 (split plane): 40.871,-3.295 40.912,-3.322 40.961,-3.332 116.926,-3.332 216.39,-3.332 216.39,-3.339 214.689,-5.04 36.828,-5.04 36.828,-1.302 37.614,-0.516 38.093,-0.516
P12V0 on P3 (split plane): 121.067,0.467 121.403,0.131 121.444,0.103 121.493,0.094 138.598,0.094 191.767,0.094 207.755,0.094 207.804,0.103 207.845,0.131 208.406,0.692 208.828,0.692 209.389,0.131 209.43,0.103 209.479,0.094 216.39,0.094 216.39,-3.077 117.054,-3.077 117.054,1.178 117.87,1.994 119.54,1.994

## Keep-outs
L1:
  lines w0.152: 188.514,13.501 190.654,15.641 190.654,18.598
L4:
  region: 6.7,-3.5 -3.3,-3.5 -3.3,3.5 6.7,3.5
  region: 6.7,85.487 -3.3,85.487 -3.3,92.4 6.7,92.4
  lines w0.152: 180.01,31.895 182.755,34.641 182.755,36.057 186.954,40.256
KeepOutLayer:
  region: 216.9,92.45 216.9,92.071 -3.5,92.071 -3.5,94.45 214.9,94.45
  lines w0.254: -6,194.45 94,294.45 194,194.45 218,218.45 142,294.45 42,194.45 ; 218,194.45 118,294.45 18,194.45 ; 218,294.45 118,194.45 18,294.45 -6,270.45 ; -6,196.45 -4,194.45 ; -6,196.45 -4,194.45 ; -6,196.45 92,294.45 192,194.45 218,220.45 144,294.45 44,194.45 ; -6,198.45 -2,194.45 ; -6,198.45 -2,194.45 ; -6,198.45 90,294.45 190,194.45 218,222.45 146,294.45 46,194.45 ; -6,200.45 0,194.45 ; -6,200.45 0,194.45 ; -6,200.45 88,294.45 188,194.45 218,224.45 148,294.45 48,194.45 ; -6,202.45 2,194.45 ; -6,202.45 2,194.45 ; -6,202.45 86,294.45 186,194.45 218,226.45 150,294.45 50,194.45 ; -6,204.45 4,194.45 ; -6,204.45 4,194.45 ; -6,204.45 84,294.45 184,194.45 218,228.45 152,294.45 52,194.45 ; -6,206.45 6,194.45 ; -6,206.45 6,194.45 ; -6,206.45 82,294.45 182,194.45 218,230.45 154,294.45 54,194.45 ; -6,208.45 8,194.45 ; -6,208.45 8,194.45 ; -6,208.45 80,294.45 180,194.45 218,232.45 156,294.45 56,194.45 ; -6,210.45 10,194.45 ; -6,210.45 10,194.45 ; -6,210.45 78,294.45 178,194.45 218,234.45 158,294.45 58,194.45 ; -6,212.45 12,194.45 ; -6,212.45 12,194.45 ; -6,212.45 76,294.45 176,194.45 218,236.45 160,294.45 60,194.45 ; -6,214.45 14,194.45 ; -6,214.45 14,194.45 ; -6,214.45 74,294.45 174,194.45 218,238.45 162,294.45 62,194.45 ; -6,216.45 16,194.45 ; -6,216.45 16,194.45 ; -6,216.45 72,294.45 172,194.45 218,240.45 164,294.45 64,194.45 ; -6,218.45 18,194.45 ; -6,218.45 18,194.45 ; -6,218.45 70,294.45 170,194.45 218,242.45 166,294.45 66,194.45 ; -6,220.45 20,194.45 ; -6,220.45 20,194.45 ; -6,220.45 68,294.45 168,194.45 218,244.45 168,294.45 68,194.45 ; -6,222.45 22,194.45 ; -6,222.45 22,194.45 ; -6,222.45 66,294.45 166,194.45 218,246.45 170,294.45 70,194.45 ; -6,224.45 24,194.45 ; -6,224.45 24,194.45 ; -6,224.45 64,294.45 164,194.45 218,248.45 172,294.45 72,194.45 ; -6,226.45 26,194.45 ; -6,226.45 26,194.45 ; -6,226.45 62,294.45 162,194.45 218,250.45 174,294.45 74,194.45 ; -6,228.45 28,194.45 ; -6,228.45 28,194.45 ; -6,228.45 60,294.45 160,194.45 218,252.45 176,294.45 76,194.45 ; -6,230.45 30,194.45 ; -6,230.45 30,194.45 ; -6,230.45 58,294.45 158,194.45 218,254.45 178,294.45 78,194.45 ; -6,232.45 32,194.45 ; -6,232.45 32,194.45 ; -6,232.45 56,294.45 156,194.45 218,256.45 180,294.45 80,194.45 ; -6,234.45 34,194.45 ; -6,234.45 34,194.45 ; -6,234.45 54,294.45 154,194.45 218,258.45 182,294.45 82,194.45 ; -6,236.45 36,194.45 ; -6,236.45 36,194.45 ; -6,236.45 52,294.45 152,194.45 218,260.45 184,294.45 84,194.45 ; -6,238.45 38,194.45 ; -6,238.45 38,194.45 ; -6,238.45 50,294.45 150,194.45 218,262.45 186,294.45 86,194.45 ; -6,240.45 40,194.45 ; -6,240.45 40,194.45 ; -6,240.45 48,294.45 148,194.45 218,264.45 188,294.45 88,194.45 ; -6,242.45 42,194.45 ; -6,242.45 42,194.45 ; -6,242.45 46,294.45 146,194.45 218,266.45 190,294.45 90,194.45 ; -6,244.45 44,194.45 ; -6,244.45 44,194.45 ; -6,244.45 44,294.45 144,194.45 218,268.45 192,294.45 92,194.45 ; -6,246.45 46,194.45 ; -6,246.45 46,194.45 ; -6,246.45 42,294.45 142,194.45 218,270.45 194,294.45 94,194.45 ; -6,248.45 48,194.45 ; -6,248.45 48,194.45 ; -6,248.45 40,294.45 140,194.45 218,272.45 196,294.45 96,194.45 -4,294.45 -6,292.45 ; -6,250.45 50,194.45 ; -6,250.45 50,194.45 ; -6,250.45 38,294.45 138,194.45 218,274.45 198,294.45 98,194.45 -2,294.45 -6,290.45 ; -6,252.45 52,194.45 ; -6,252.45 52,194.45 ; -6,252.45 36,294.45 136,194.45 218,276.45 200,294.45 100,194.45 0,294.45 -6,288.45 ; -6,254.45 54,194.45 ; -6,254.45 54,194.45 ; -6,254.45 34,294.45 134,194.45 218,278.45 202,294.45 102,194.45 2,294.45 -6,286.45 ; -6,256.45 56,194.45 ; -6,256.45 56,194.45 ; -6,256.45 32,294.45 132,194.45 218,280.45 204,294.45 104,194.45 4,294.45 -6,284.45 ; -6,258.45 58,194.45 ; -6,258.45 58,194.45 ; -6,258.45 30,294.45 130,194.45 218,282.45 206,294.45 106,194.45 6,294.45 -6,282.45 ; -6,260.45 60,194.45 ; -6,260.45 60,194.45 ; -6,260.45 28,294.45 128,194.45 218,284.45 208,294.45 108,194.45 8,294.45 -6,280.45 ; -6,262.45 62,194.45 ; -6,262.45 62,194.45 ; -6,262.45 26,294.45 126,194.45 218,286.45 210,294.45 110,194.45 10,294.45 -6,278.45 ; -6,264.45 64,194.45 ; -6,264.45 64,194.45 ; -6,264.45 24,294.45 124,194.45 218,288.45 212,294.45 112,194.45 12,294.45 -6,276.45 ; -6,266.45 66,194.45 ; -6,266.45 66,194.45 ; -6,266.45 22,294.45 122,194.45 218,290.45 214,294.45 114,194.45 14,294.45 -6,274.45 ; -6,268.45 68,194.45 ; -6,268.45 68,194.45 ; -6,268.45 20,294.45 120,194.45 218,292.45 216,294.45 116,194.45 16,294.45 -6,272.45 ; -6,270.45 70,194.45 ; -6,270.45 70,194.45 ; -6,272.45 72,194.45 ; -6,272.45 72,194.45 ; -6,274.45 74,194.45 ; -6,274.45 74,194.45 ; -6,276.45 76,194.45 ; -6,276.45 76,194.45 ; -6,278.45 78,194.45 ; -6,278.45 78,194.45 ; -6,280.45 80,194.45 ; -6,280.45 80,194.45 ; -6,282.45 82,194.45 ; -6,282.45 82,194.45 ; -6,284.45 84,194.45 ; -6,284.45 84,194.45 ; -6,286.45 86,194.45 ; -6,286.45 86,194.45 ; -6,288.45 88,194.45 ; -6,288.45 88,194.45 ; -6,290.45 90,194.45 ; -6,290.45 90,194.45 ; -6,292.45 92,194.45 ; -6,292.45 92,194.45 ; -4,194.45 96,294.45 196,194.45 218,216.45 140,294.45 40,194.45 ; -2,194.45 98,294.45 198,194.45 218,214.45 138,294.45 38,194.45 ; 0,194.45 100,294.45 200,194.45 218,212.45 136,294.45 36,194.45 ; 2,194.45 102,294.45 202,194.45 218,210.45 134,294.45 34,194.45 ; 4,194.45 104,294.45 204,194.45 218,208.45 132,294.45 32,194.45 ; 6,194.45 106,294.45 206,194.45 218,206.45 130,294.45 30,194.45 ; 8,194.45 108,294.45 208,194.45 218,204.45 128,294.45 28,194.45 ; 10,194.45 110,294.45 210,194.45 218,202.45 126,294.45 26,194.45 ; 12,194.45 112,294.45 212,194.45 218,200.45 124,294.45 24,194.45 ; 14,194.45 114,294.45 214,194.45 218,198.45 122,294.45 22,194.45 ; 16,194.45 116,294.45 216,194.45 218,196.45 120,294.45 20,194.45 ; 94,194.45 -6,294.45 94,194.45

## Other copper
L1:
  rectangle net GND: 202.9,42.7 216.492,46.203
  pour cut-out: 96.932,-3.156 96.932,-5.142 116.932,-5.142 116.932,-3.156
  pour cut-out: 36.5,-3.156 36.5,-5.142 41.932,-5.142 41.932,-3.156
  region net NetIC27_9: 105.109,1.21 108.609,1.21 108.609,2.479 109.05,2.919 110.669,2.919 110.669,3.21 109.96,3.21 105.109,3.21
L4:
  pour cut-out: 116.932,-3.156 96.932,-3.156 96.932,-5.142 116.932,-5.142
  pour cut-out: 36.5,-3.156 41.932,-3.156 41.932,-5.142 36.5,-5.142
P3 (plane layer: these items are gaps in the copper):
  lines w0.25: 36.701,-5.543 36.701,-1.249 37.561,-0.389 38.145,-0.389 40.961,-3.205 116.926,-3.205 ; 191.767,0.221 207.755,0.221 208.354,0.82 208.88,0.82 209.479,0.221 216.804,0.221 ; 192.598,0.221 138.598,0.221 121.493,0.221 121.157,0.557 119.592,2.121 117.817,2.121 116.926,1.231 116.926,-3.205 ; 216.725,-3.205 116.926,-3.205
P2 (plane layer: these items are gaps in the copper):
  lines w0.381: 216.725,-3.205 216.725,-2.7

## Silkscreen, mask and mechanical layers (free items; w line width, h text height)
TopOverlay:
  drawing of 1241 lines, arcs and shapes, not listed
  text "Y0" at 29.497,81.48 h1
  text "Y1" at 43.107,77.76 h1
  text "Y2" at 29.497,74.616 h1
  text "P6" at 195.358,72.239 h1.52
  text "YCLK" at 43.107,70.896 h1
  text "Y3" at 29.497,67.753 h1
  text "Z0" at 42.907,63.782 h1
  text "EEM2" at 157.055,62.512 h1.52
  text "EEM1" at 172.308,62.525 h1.52
  text "EEM0" at 187.055,62.512 h1.52
  text "Z1" at 27.334,60.639 h1
  text "Z2" at 42.907,56.919 h1
  text "ZCLK" at 27.198,53.775 h1
  text "Z3" at 42.907,49.891 h1
  text "ZCLK and Z0-Z3 are only supported in EEM variant!" at 9.052,44.189 h1.2
  text "Grabber_DIOT  v.P_version" at 91.004,42.861 h1.52
  text "X0" at 29.497,40.297 h1
  text "WUT ISE .ModifiedDate" at 100.526,39.737 h1.02
  text "X1" at 43.107,36.577 h1
  text "X2" at 29.497,33.434 h1
  text "LVDS CH0...7 EEM-0" at 185.086,29.982 h1.02 r90
  text "LVDS CH8...15 EEM-1" at 170.114,29.728 h1.02 r90
  text "XCK" at 43.107,29.713 h1
  text "LVDS CH16...23 EEM-2" at 155.119,29.051 h1.02 r90
  text "X3" at 29.497,26.57 h1
  text "SERTX" at 43.107,23.282 h1
  text "SERRX" at 26.498,19.706 h1
  text "CC0" at 43.107,16.418 h1
  text "P3V3MP3" at 155.962,14.302 h1
  text "P3V3MP2" at 164.565,14.302 h1
  text "P3V3MP" at 173.066,14.302 h1
  text "CC1" at 28.831,13.275 h1
  text "P1" at 195.515,11.415 h1.52
  text "CC2" at 43.107,9.555 h1
  text "CC3" at 28.497,6.411 h1
  text "P3V3" at 97.119,5.094 h1
  text "GND" at 158.356,5.08 h1
  text "GND" at 166.865,5.08 h1
  text "GND" at 175.374,5.08 h1
  text "P12V0" at 116.769,4.728 h1
  text "GND" at 98.136,3.477 h1
  text "GND" at 116.769,-2.089 h1
Bottom Overlay:
  drawing of 1237 lines, arcs and shapes, not listed
  text "PGOOD" at 0.187,77.35 h0.8
  text "Grabber_DIOT  v.P_version" at 119.279,42.762 h1.52
  text "WUT ISE .ModifiedDate" at 109.757,39.638 h1.02
  text "OVERTEMP" at 2.346,13.836 h0.8
TopSolder:
  rectangle: 202.9,42.7 216.9,46.203
  region: -3.5,-3.254 -3.5,-5.55 214.9,-5.55 216.9,-3.55 216.9,-3.254
Bottom Solder:
  rectangle: 202.9,42.7 216.9,46.203
  region: -3.5,-3.254 -3.5,-5.55 214.9,-5.55 216.9,-3.55 216.9,-3.254
PCB Outline:
  the board outline again, w0.05
Mechanical4:
  drawing of 335 lines, arcs and shapes, not listed
  text "Layer" at 48.992,141.93 h1.52
  text "Name" at 59.404,141.93 h1.52
  text "Material" at 83.019,141.93 h1.52
  text "Thickness" at 104.857,141.93 h1.52
  text "Constant" at 121.363,141.93 h1.52
  text "Board Layer Stack" at 135.837,141.93 h1.52
  text "TopOverlay" at 59.404,138.882 h1.52
  text "TopSolder" at 59.404,135.834 h1.52
  text "Solder Resist" at 83.019,135.834 h1.52
  text "0.010mm" at 104.857,135.834 h1.52
  text "3.5" at 121.363,135.834 h1.52
  text "1" at 48.992,132.786 h1.52
  text "L1" at 59.404,132.786 h1.52
  text "0.045mm" at 104.857,132.786 h1.52
  text "Dielectric1" at 59.404,129.738 h1.52
  text "FR-4" at 83.019,129.738 h1.52
  text "0.120mm" at 104.857,129.738 h1.52
  text "4.2" at 121.363,129.738 h1.52
  text "2" at 48.992,126.69 h1.52
  text "P2" at 59.404,126.69 h1.52
  text "0.035mm" at 104.857,126.69 h1.52
  text "Dielectric 2" at 59.404,123.642 h1.52
  text "FR-4" at 83.019,123.642 h1.52
  text "1.200mm" at 104.857,123.642 h1.52
  text "4.2" at 121.363,123.642 h1.52
  text "3" at 48.992,120.594 h1.52
  text "P3" at 59.404,120.594 h1.52
  text "0.035mm" at 104.857,120.594 h1.52
  text "Dielectric 3" at 59.404,117.546 h1.52
  text "FR-4" at 83.019,117.546 h1.52
  text "0.120mm" at 104.857,117.546 h1.52
  text "4.2" at 121.363,117.546 h1.52
  text "4" at 48.992,114.498 h1.52
  text "L4" at 59.404,114.498 h1.52
  text "0.045mm" at 104.857,114.498 h1.52
  text "Bottom Solder" at 59.404,111.45 h1.52
  text "Solder Resist" at 83.019,111.45 h1.52
  text "0.010mm" at 104.857,111.45 h1.52
  text "3.5" at 121.363,111.45 h1.52
  text "Bottom Overlay" at 59.404,108.402 h1.52
  text "Transmission Line Structure Table" at -0.399,-26.724 h2.38
  text "Transmission Line" at 0.111,-32.265 h2.38
  text "Target Impedance" at 71.11,-32.265 h2.38
  text "Trace layer" at 109.545,-32.265 h2.38
  text "Reference layers" at 135.682,-32.265 h2.38
  text "Trace Width" at 174.086,-32.265 h2.38
  text "Gap" at 204.612,-32.265 h2.38
  text "Edge-Coupled Coated Microstrip" at 0.111,-37.784 h2.38
  text "100" at 83.052,-37.784 h2.38
  text "L1" at 116.749,-37.784 h2.38
  text "P2" at 147.622,-37.784 h2.38
  text "0.127mm" at 176.349,-37.784 h2.38
  text "0.127mm" at 200.392,-37.784 h2.38
  text "Edge-Coupled Coated Microstrip" at 0.111,-43.302 h2.38
  text "100" at 83.052,-43.302 h2.38
  text "L4" at 116.749,-43.302 h2.38
  text "P3" at 147.622,-43.302 h2.38
  text "0.127mm" at 176.349,-43.302 h2.38
  text "0.127mm" at 200.392,-43.302 h2.38
Mechanical13:
  lines w0.1: -5.684,-5.589 -5.684,95.393

## Text inside footprints (layer, text, board x,y; h text height)
J1: TopOverlay "25" at -3.321,32.49 h1.02 r90; TopOverlay "12" at 0.489,32.615 h1.02 r90; TopOverlay "13" at 2.394,33.895 h1.02 r90; TopOverlay "26" at -1.416,33.77 h1.02 r90; TopOverlay "14" at -1.421,14.86 h1.02 r90; TopOverlay "15" at -3.326,15.98 h1.02 r90; TopOverlay "2" at 0.484,16.68 h1.02 r90; TopOverlay "1" at 2.389,15.81 h1.02 r90; Mechanical14 "25" at -3.321,32.49 h1.02 r90; Mechanical14 "12" at 0.489,32.615 h1.02 r90; Mechanical14 "13" at 2.394,33.895 h1.02 r90; Mechanical14 "26" at -1.416,33.77 h1.02 r90; Mechanical14 "14" at -1.421,14.86 h1.02 r90; Mechanical14 "15" at -3.326,15.98 h1.02 r90; Mechanical14 "2" at 0.484,16.68 h1.02 r90; Mechanical14 "1" at 2.389,15.81 h1.02 r90
J2: TopOverlay "25" at -3.321,74.39 h1.02 r90; TopOverlay "12" at 0.489,74.515 h1.02 r90; TopOverlay "13" at 2.394,75.795 h1.02 r90; TopOverlay "26" at -1.416,75.67 h1.02 r90; TopOverlay "14" at -1.421,56.76 h1.02 r90; TopOverlay "15" at -3.326,57.88 h1.02 r90; TopOverlay "2" at 0.484,58.58 h1.02 r90; TopOverlay "1" at 2.389,57.71 h1.02 r90; Mechanical14 "25" at -3.321,74.39 h1.02 r90; Mechanical14 "12" at 0.489,74.515 h1.02 r90; Mechanical14 "13" at 2.394,75.795 h1.02 r90; Mechanical14 "26" at -1.416,75.67 h1.02 r90; Mechanical14 "14" at -1.421,56.76 h1.02 r90; Mechanical14 "15" at -3.326,57.88 h1.02 r90; Mechanical14 "2" at 0.484,58.58 h1.02 r90; Mechanical14 "1" at 2.389,57.71 h1.02 r90